# Altium PCB POWER_ADM.PcbDoc
Units mm, origin at the board's own origin, x right, y up, seen from the top; angles counter-clockwise.
Board outline 46.74 x 46.48 mm, 2 copper layers (Top Layer, Bottom Layer); 20 components, 8 nets, 52 pads, 11 vias.
Unrouted connection lines stored in the file: 2.
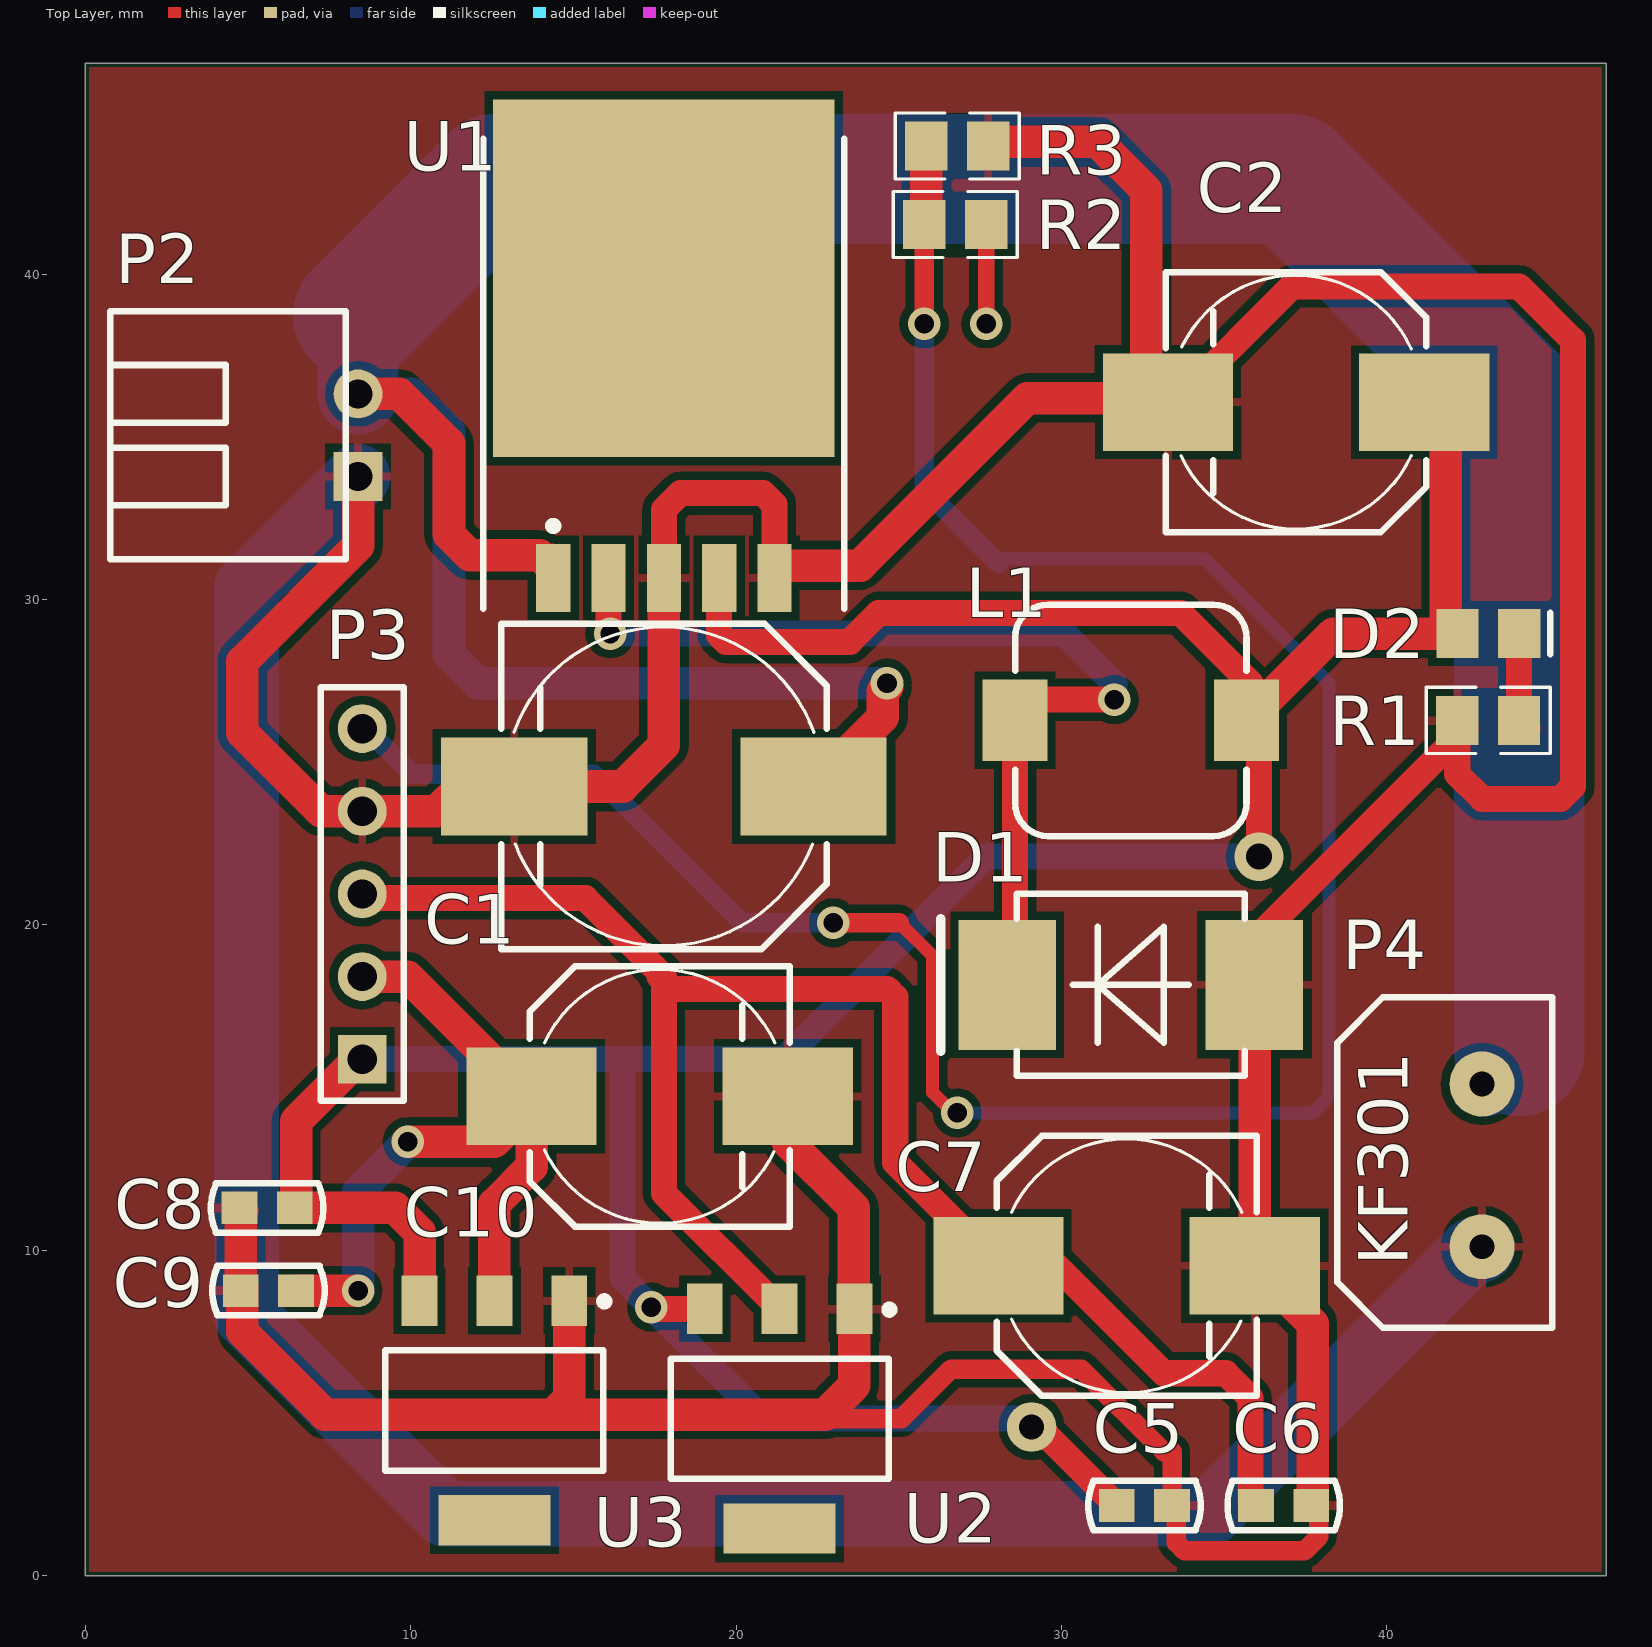
[diagram p0: Top Layer view]
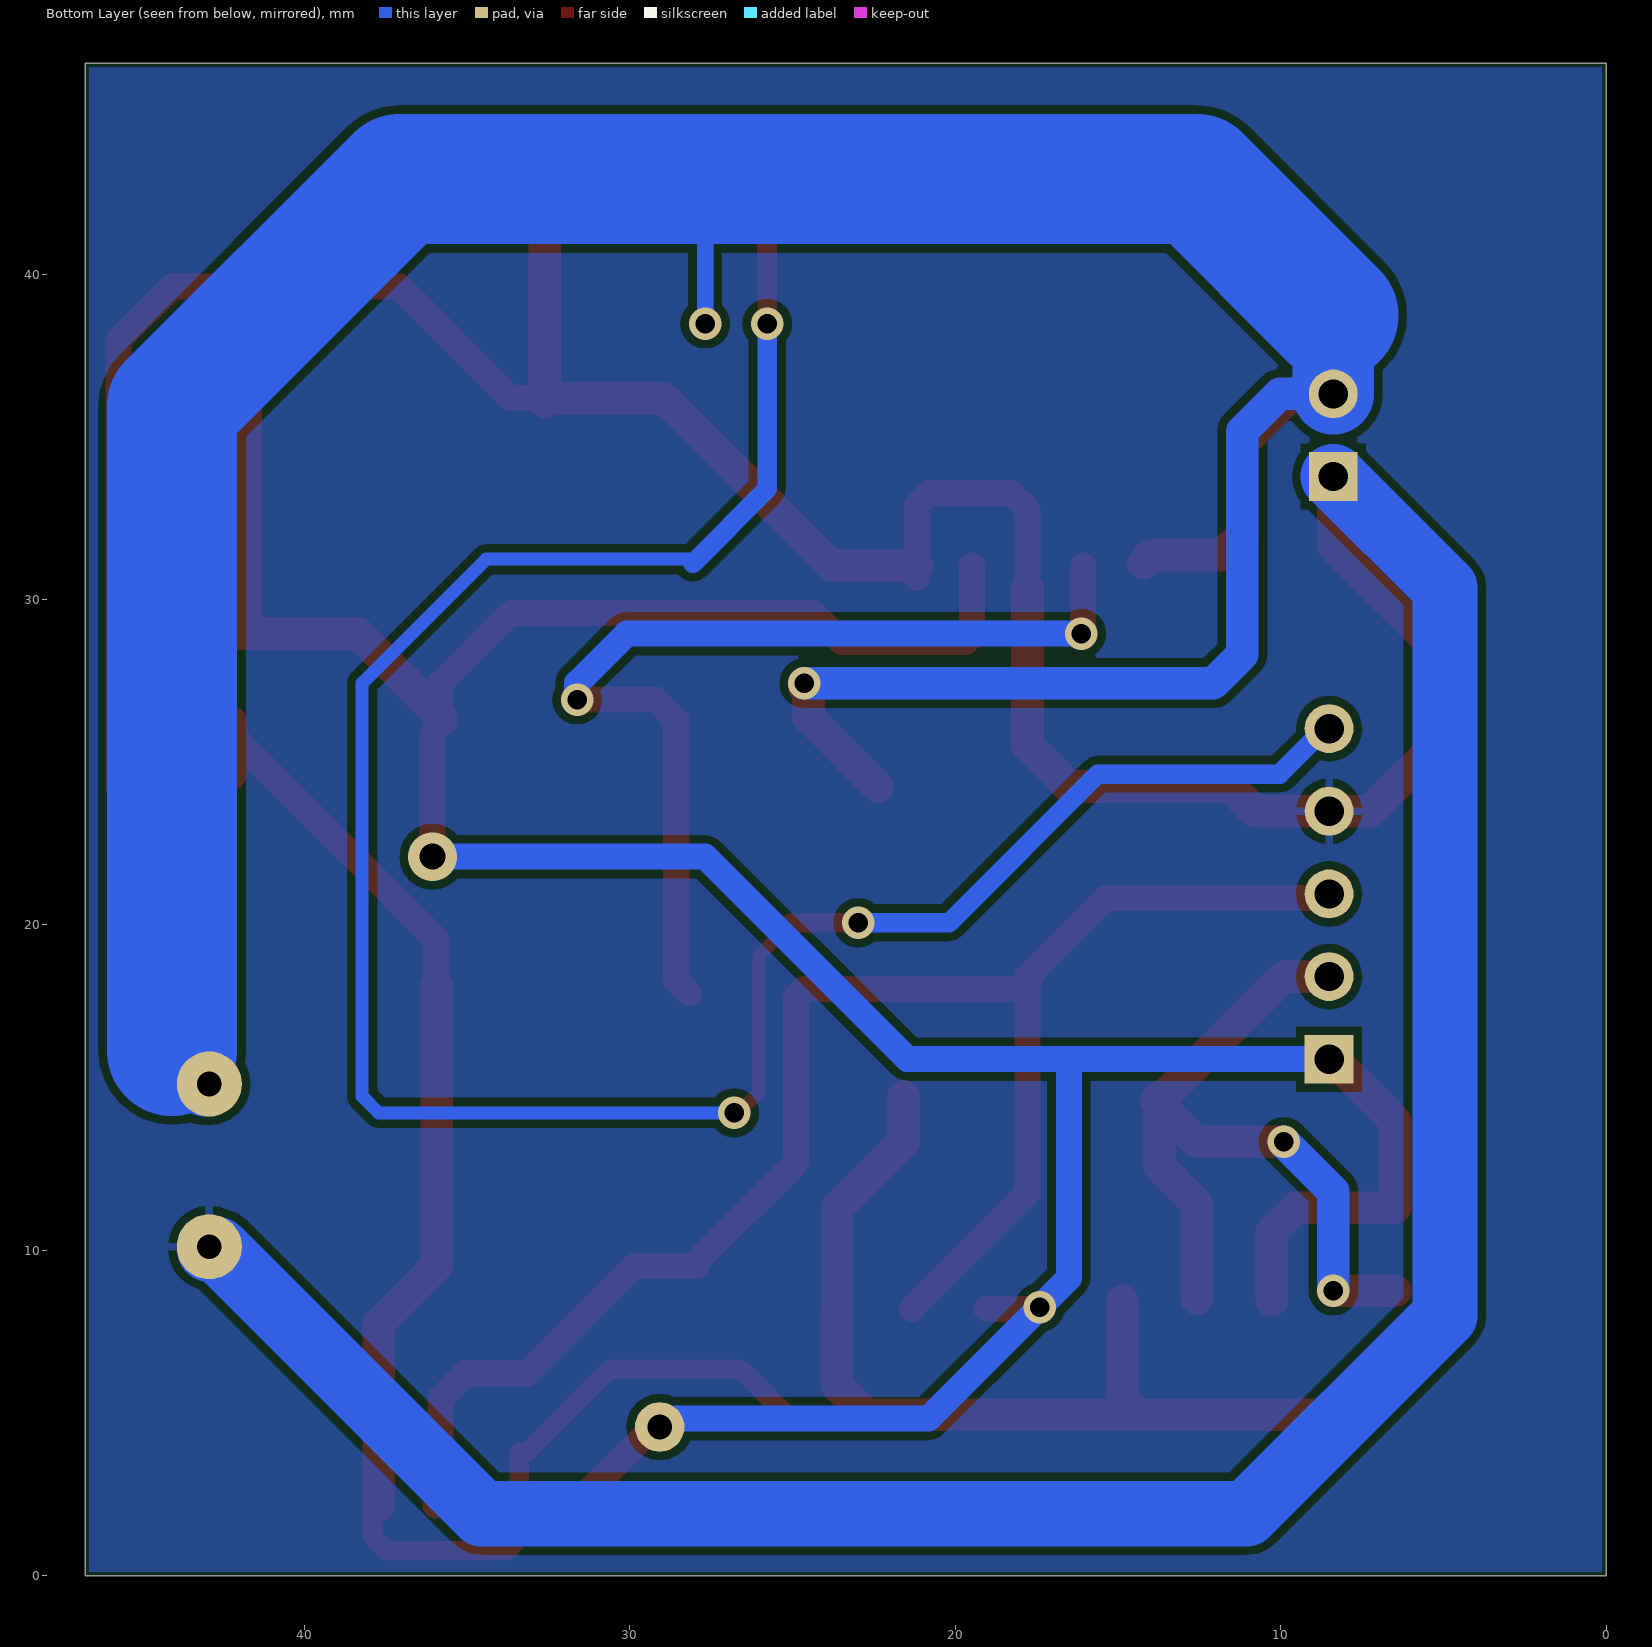
[diagram p1: Bottom Layer view, seen from below]

## Layer stack, top to bottom
Top Solder: solder mask 0.0102, Solder Resist, Dk 3.5
Top Layer: signal copper 0.0356
Dielectric1: dielectric 0.32, FR-4, Dk 4.8
Bottom Layer: signal copper 0.0356
Bottom Solder: solder mask 0.0102, Solder Resist, Dk 3.5

## Board outline
0,0 0,46.482 46.736,46.482 46.736,0

## Design rules (kind name [scope] priority, off if disabled: settings)
Clearance [All] p1: gap=0.254 ignorepadtopadclearanceinfootprint=FALSE except(0: Arc-Hole Track-Hole SMDPad-Hole THPad-Hole Via-Hole Fill-Hole Poly-Hole Region-Hole Text-Hole)
PolygonConnect [All] p1: connectstyle=Relief reliefconductorwidth=0.254 reliefentries=4 polygonreliefangle="90 Angle" airgapwidth=0.254
RoutingVias [All] p1: holewidth=0.711 width=1.27 viastyle="Through Hole" minholewidth=0.711 minwidth=1.27 maxholewidth=0.711 maxwidth=1.27
SilkToSolderMaskClearance SilkscreenOverComponentPads [IsPad] p1: minsilkscreentomaskgap=0.254 clearancetoexposedcopper=TRUE
SolderMaskExpansion [All] p1: expansion=0.102
Width [All] p1: maxlimit=5 minlimit=0.254 preferedwidth=1
29 further rules are at their usual default settings.

## Components (designator, comment, footprint, x,y, rotation, side; value= is the part's Value field where it differs from the comment)
C1 "Cap Pol" C-RB-S10 17.78,24.257 r180 top value=470uF
C2 "Cap Pol" C-RB-S8 37.211,36.068 r180 top value=100uF
C5 "Cap" C-RAD-0603 32.551,2.159 r180 top value=104
C6 "Cap" C-RAD-0603 36.83,2.159 r180 top value=104
C7 "Cap Pol" C-RB-S8 32.004,9.525 r0 top value=220uF
C8 "Cap" C-RAD-0603 5.588,11.303 r0 top value=104
C9 "Cap" C-RAD-0603 5.627,8.763 r0 top value=104
C10 "Cap Pol" C-RB-S8 17.653,14.732 r0 top value=220uF
D1 "D-Schottky" DIODE-SMC 32.131,18.161 r180 top
D2 "Bulle" LED_0805 43.119,28.956 r0 top
L1 "Inductor" L-SMD-7 32.131,26.289 r0 top value=33uH
P2 "Header 2" HDR2X1_B2 8.382,33.782 r90 top
P3 "Header 5" HDR1X5 8.509,15.875 r90 top
P4 "Header 2" KF301_2 42.926,15.113 r0 top
R1 "Res1" 0805-1 43.114,26.289 r0 top value=1K
R2 "Res1" 0805-1 26.736,41.529 r0 top value=10K
R3 "Res1" 0805-1 26.797,43.942 r180 top value=1.5K
U1 "LM2596SX_ADJ_NOP" TO-263-5 17.78,34.891 r0 top value=Value
U2 "ASM1117" SOT-223 21.336,4.826 r180 top
U3 "ASM1117" SOT-223 12.573,5.08 r180 top

## Footprints (in the part's own frame and the unit in brackets; to place one, negate y for a bottom-side part, rotate by r counter-clockwise, add the part's x,y. Pads: shape width x height; smd on the part's side, far side on the other; paste and mask are expansions set on the pad)
0805-1 [mm] "贴片带丝印"
  rect 1.3x1.5 smd: 1(-0.95,0) 2(0.95,0)
  silkscreen extent -1.91,-1.02 1.91,1.02, body extent -1.14,-0.51 1.14,0.51, height 1
C-RAD-0603 [mm] "贴片电容"
  rect 1.1x1 smd: 1(-0.85,0) 2(0.85,0)
  silkscreen extent -1.73,-0.76 1.73,0.76, body extent -1.14,-0.38 1.14,0.38, height 1
C-RB-S8 [mm] "贴片电解"
  rect 4x3 smd: 1(-3.937,0) 2(3.937,0)
  silkscreen extent -4,-4 4,4, body extent -3.94,-3.94 3.94,3.94, height 10.9
C-RB-S10 [mm] "贴片电解"
  rect 4.5x3 smd: 1(-4.6,0) 2(4.6,0)
  silkscreen extent -5,-5 5,5
DIODE-SMC [mm] "贴片二极管"
  rect 3x4 smd: 1(-3.8,0) 2(3.8,0)
  silkscreen extent -3.5,-2.79 5.84,2.79, body extent -3.81,-2.79 3.94,2.79, height 1.05
HDR1X5 [mm] "Connector; Header; 5 Position"
  rect 1.5x1.5 hole 0.9: 1(0,0)
  round 1.5 hole 0.9: 2(2.54,0) 3(5.08,0) 4(7.62,0) 5(10.16,0)
  silkscreen extent -1.27,-1.27 11.43,1.27
HDR2X1_B2 [mm] "Connector; Header; 4 Position"
  rect 1.5x1.5 hole 0.9: 1(0,0)
  round 1.5 hole 0.9: 2(2.54,0)
  silkscreen extent -2.54,0.38 5.08,7.62, body extent -2.54,0.38 5.08,7.62, height 1.5
KF301_2 [mm]
  round 2 hole 0.762: 1(0,-5) 2(0,0)
  silkscreen extent -4.44,-7.49 2.16,2.67
L-SMD-7 [mm] "贴片电感7*7"
  rect 2x2.5 smd: 1(-3.556,0) 2(3.556,0)
  silkscreen extent -3.56,-3.56 3.56,3.56, body extent -3.56,-3.56 3.56,3.56, height 4
LED_0805 [mm] "贴片二极管"
  rect 1.3x1.5 smd: 1(-0.95,0) 2(0.95,0)
  silkscreen extent 1.91,-0.64 1.91,0.64
SOT-223 [mm]
  rect 1.1x1.55 smd: 1(-2.3,-3.375) 2(0,-3.375) 3(2.3,-3.375)
  rect 3.45x1.55 smd: 4(0,3.375)
  silkscreen extent -3.5,-3.48 3.35,1.85, body extent -3.3,-3.94 3.3,3.43, height 0.8
TO-263-5 [mm] "贴片LM2596"
  rect 1.05x2.1 smd: 1(-3.4,-4.225) 2(-1.7,-4.225) 3(0,-4.225) 4(1.7,-4.225) 5(3.4,-4.225)
  rect 10.5x11 smd: 6(0,4.987)
  silkscreen extent -5.55,-5.18 5.55,9.28, body extent -5.33,-4.7 5.33,10.29, height 3

## Part data
C1 C2 C7 C10: "极性电解电容", LatestRevisionDate=17-Jul-2002, LatestRevisionNote="Re-released for DXP Platform.", PackageReference=RB7.6-15, Published=8-Jun-2000, Publisher="Altium Limited"
  C1: Vol=35V
  C2 C7 C10: Vol=16V
C5 C6 C8 C9: "无极性电容", LatestRevisionDate=17-Jul-2002, LatestRevisionNote="Re-released for DXP Platform.", PackageReference=RAD-0.3, Published=8-Jun-2000, Publisher="Altium Limited"
D1: "肖特基二极管", Code_JEDEC=DO-214-AA, LatestRevisionDate=17-Jul-2002, LatestRevisionNote="Re-released for DXP Platform.", PackageReference=SMB, Published=8-Jun-2000, Publisher="Altium Limited", Type=SS14
D2: library part LED0, "发光二极管", LatestRevisionDate=08-Jul-2005, LatestRevisionNote="Mech Layer 1 removed.", PackageReference=LED-0, Published=8-Jun-2000, Publisher="Altium Limited"
L1: "电感", Code_IEC=1005, Code_JEITA=0402, LatestRevisionDate=17-Jul-2002, LatestRevisionNote="Re-released for DXP Platform.", PackageReference=0402-A, Published=8-Jun-2000, Publisher="Altium Limited"
P2: "Header, 2-Pin", LatestRevisionDate=17-Jul-2002, LatestRevisionNote="Re-released for DXP Platform.", Publisher="Altium Limited"
P3: "Header, 5-Pin", LatestRevisionDate=17-Jul-2002, LatestRevisionNote="Re-released for DXP Platform.", Publisher="Altium Limited"
P4: "接插件", LatestRevisionDate=17-Jul-2002, LatestRevisionNote="Re-released for DXP Platform.", Publisher="Altium Limited"
R1 R2 R3: "贴片电阻", LatestRevisionDate=17-Jul-2002, LatestRevisionNote="Re-released for DXP Platform.", PackageReference=AXIAL-0.4, Published=8-Jun-2000, Publisher="Altium Limited"
U1: "Imported", Alternate_PartNumber=LM2596S-ADJ/NOPB, Manufacturer="Texas Instruments", PartNumber=LM2596SX-ADJ/NOPB, CompType=IC, MountType=SMT, PackageReference=KTT0005B, PIN_COUNT=6, RefDes=RefDes, RoHS=Y, Type=TYPE
U2 U3: "3.3V稳压芯片"

## Free pads (board coordinates)
  round 1.524 hole 0.762: 2(29.083,4.572)

## Via types
v1: diameter 1, hole 0.6, Top Layer to Bottom Layer, 10 vias
v2: diameter 1.5, hole 0.8, Top Layer to Bottom Layer, 1 vias

## Nets (pads, with @x,y where several pads share a name; then routed paths per layer and width w, separated by ;. In a path a pad name is that pad's centre, name@x,y a point inside that pad or via, vN(x,y) a via of type N, cw(c..) or ccw(c..) an arc to the next point about the centre after c; other vN are vias at no path point)
3V3: C9.2 C10.1 P3.2 U3.2 U3.4 | length 24.9
  Top Layer w1: C9.2 v1@8.255,8.763 ; P3.2 9.906,18.415 13.589,14.732 C10.1 C10.1@13.716,14.478 ; v1(9.906,13.335) 12.573,13.335 C10.1@13.716,14.478 ; U3.2@12.573,8.509 12.573,11.43 13.716,12.573 C10.1@13.716,14.478 ; C10.1@13.843,14.605 C10.1@13.716,14.478
  Bottom Layer w1: v1(8.382,8.763) 8.382,11.811 v1(9.906,13.335)
+5V: C2.1 C5.2 C8.2 D2.1 L1.2 P3.1 pad.2 U1.4 U2.3 U3.3 | length 108.2
  Top Layer w0.8: v1@17.345,8.201 U2.3 ; U1.4@19.48,31.047 U1.4 19.48,28.907 19.685,28.702 23.495,28.702 24.384,29.591 33.655,29.591 35.814,27.432 35.814,26.416 L1.2@35.814,26.289 ; pad.2 29.288,4.572 C5.2 ; L1.2 36.068,25.908 v2(36.068,22.098)
  Top Layer w1: C8.2@6.477,11.303 6.477,13.97 P3.1@8.382,15.875 ; C8.2@6.604,11.303 9.525,11.303 10.273,10.555 U3.3 ; L1.2@35.814,26.416 38.354,28.956 D2.1@42.164,28.956 ; C2.1@41.811,36.068 41.811,29.309 D2.1@42.164,28.956 ; D2.1 D2.1@42.164,28.956
  Bottom Layer w0.8: P3.1@8.382,15.875 P3.1 16.256,15.875 ; pad.2@28.956,4.572 28.702,4.826 20.828,4.826 v1(17.399,8.255) 16.51,9.144 16.51,15.621 16.256,15.875 ; v2@36.068,22.225 35.941,22.098 27.686,22.098 21.463,15.875 16.256,15.875
+12V: C1.1 P2.2 P4.2 R2.2 U1.1 | length 108.9
  Top Layer w0.254: P2.2@8.255,36.322 P2.2 ; U1.1@14.38,31.047 U1.1@14.38,31.594
  Top Layer w0.5: v1(27.686,38.481) R2.2
  Top Layer w1: P2.2 9.652,36.322 11.176,34.798 11.176,32.004 11.811,31.369 13.97,31.369 U1.1@14.224,31.115 ; C1.1 24.511,26.388 24.511,27.178 v1@24.638,27.305
  Bottom Layer w0.5: 27.559,42.037 27.686,41.91 v1(27.686,38.481)
  Bottom Layer w1: P2.2 10.033,36.322 11.176,35.179 11.176,28.321 12.065,27.432 v1(24.638,27.432)
  Bottom Layer w2: P4.2@43.053,15.113 44.069,16.129
  Bottom Layer w2.5: P2.2 8.382,38.735
  Bottom Layer w4: 8.382,38.735 12.573,42.926 37.084,42.926 44.069,35.941 44.069,16.129
ADC_V: P3.5 R2.1 R3.2 | length 75.7
  Top Layer w0.4: 25.019,20.066 26.035,19.05 26.035,14.859 v1@26.67,14.224
  Top Layer w0.6: v1(22.987,20.066) 25.019,20.066 ; v1@25.781,38.354 v1(25.781,38.481) 25.786,41.407 R2.1
  Top Layer w1: R2.1@25.786,41.407 25.847,41.468 R3.2
  Bottom Layer w0.4: v1(26.797,14.224) 37.719,14.224 38.227,14.732 38.227,27.432 34.417,31.242 28.067,31.242
  Bottom Layer w0.6: P3.5@8.509,26.162 10.033,24.638 15.621,24.638 20.193,20.066 v1(22.987,20.066) ; v1(25.781,38.481) 25.781,33.401 28.067,31.115
GND: C1.2 C2.2 C5.1 C6.1 C7.2 C8.1 C9.1 C10.2 D1.1 P2.1 P3.4 P4.1 R1.1 R3.1 U1.3 U1.5 U2.1 U3.1 | length 254.6
  Top Layer w0.6: 22.606,4.953 22.733,4.826 25.082,4.826 26.607,6.35 30.607,6.35 33.147,3.81 33.401,3.81 C5.1@33.401,2.286 ; C5.1 C5.1@33.401,2.286 ; C6.1@37.846,2.159 37.91,2.095 37.91,1.206 37.465,0.762 33.782,0.762 33.528,1.016 33.528,2.159 C5.1@33.401,2.286
  Top Layer w0.8: U1.3@17.78,30.353 U1.3 17.78,32.766 18.288,33.274 20.828,33.274 21.18,32.922 21.18,31.047 U1.5 ; C2.2@32.766,36.195 33.655,36.195 37.084,39.624 44.069,39.624 45.72,37.973 45.72,24.257 45.339,23.876 42.926,23.876 42.164,24.638 R1.1@42.164,25.776 ; D1.1@35.941,18.161 35.941,19.553 R1.1@42.164,25.776 ; R1.1 R1.1@42.164,25.776 ; R1.1@42.423,26.035 R1.1@42.164,25.776
  Top Layer w1: C8.1@4.699,11.303 4.777,11.225 C9.1 ; C8.1 C8.1@4.826,11.215 ; C9.1@4.826,8.89 4.826,7.493 7.366,4.953 14.379,4.953 ; P3.4@8.382,23.495 7.239,23.495 4.826,25.908 4.826,28.099 8.382,31.655 P2.1 ; P3.4 10.795,23.495 11.557,24.257 C1.2 16.51,24.257 17.78,25.527 U1.3@17.78,30.353 ; U3.1 14.873,5.447 14.379,4.953 ; U1.5@21.18,31.047 23.808,31.047 28.956,36.195 32.512,36.195 C2.2@32.611,36.096 ; C10.2 21.59,13.335 23.622,11.303 U2.1@23.622,8.128 ; U2.1 23.636,5.856 22.733,4.953 22.606,4.953 14.379,4.953 ; R3.1@27.813,44.069 31.115,44.069 32.611,42.573 C2.2@32.611,36.096 ; C2.2@32.611,36.068 C2.2@32.611,36.096 ; D1.1@35.941,18.161 C7.2 37.719,7.747 C6.1@37.719,2.159
  Bottom Layer w2: P2.1 4.953,30.353 4.953,8.001 11.049,1.905 34.544,1.905 42.672,10.033 P4.1@42.926,10.033
NetD1_2: D1.2 L1.1 U1.2 | length 30.6
  Top Layer w0.8: U1.2@16.08,31.047 U1.2 16.08,29.005 v1(16.129,28.956) ; D1.2@28.194,17.907 28.575,18.288 L1.1 29.21,26.924 v1(31.623,26.924)
  Bottom Layer w0.8: v1(16.129,28.956) 30.099,28.956 31.623,27.432 v1(31.623,26.924)
NetD2_2: D2.2 R1.2 | length 3
  Top Layer w0.8: D2.2 44.069,26.289 R1.2@44.323,26.035
VCC3.3: C6.2 C7.1 P3.3 U2.2 U2.4 | length 52
  Top Layer w0.8: P3.3 8.636,20.828 15.367,20.828 17.78,18.415 17.78,18.288 ; 17.653,18.415 17.78,18.288 ; U2.2 17.78,11.757 17.78,18.288 ; C7.1@27.94,9.525 C7.1 ; C6.2 35.814,2.325 35.814,5.461 35.052,6.223 33.147,6.223 29.845,9.525 C7.1 ; 17.78,18.288 18.034,18.034 24.638,18.034 24.892,17.78 24.892,12.7 C7.1
pads on no net: U1.6

## Polygon pours and split planes (outlines as drawn)
GND on Top Layer "Bottom Layer-No Net" (solid, pour order 0): 0.127,46.355 46.609,46.355 46.609,0.127 0.127,0.127
GND on Bottom Layer "Bottom Layer-No Net" (solid, pour order 2): 0.127,46.355 46.609,46.355 46.609,0.127 0.127,0.127

## Silkscreen, mask and mechanical layers (free items; w line width, h text height)
Bottom Solder:
  circle w0.254: c43.434,3.81 r1.656
  circle w0.254: c43.434,42.799 r1.626
  circle w0.254: c3.302,42.799 r1.656
  circle w0.254: c3.302,3.81 r1.694
  lines w0.254: 0,0 46.736,0 46.736,46.482 0,46.482 0,0

## Text inside footprints (layer, text, board x,y; h text height)
P4: Top Overlay "KF301" at 40.64,9.525 h1.52 r90